# EAGLE board simple-pannel (EAGLE 5.07)
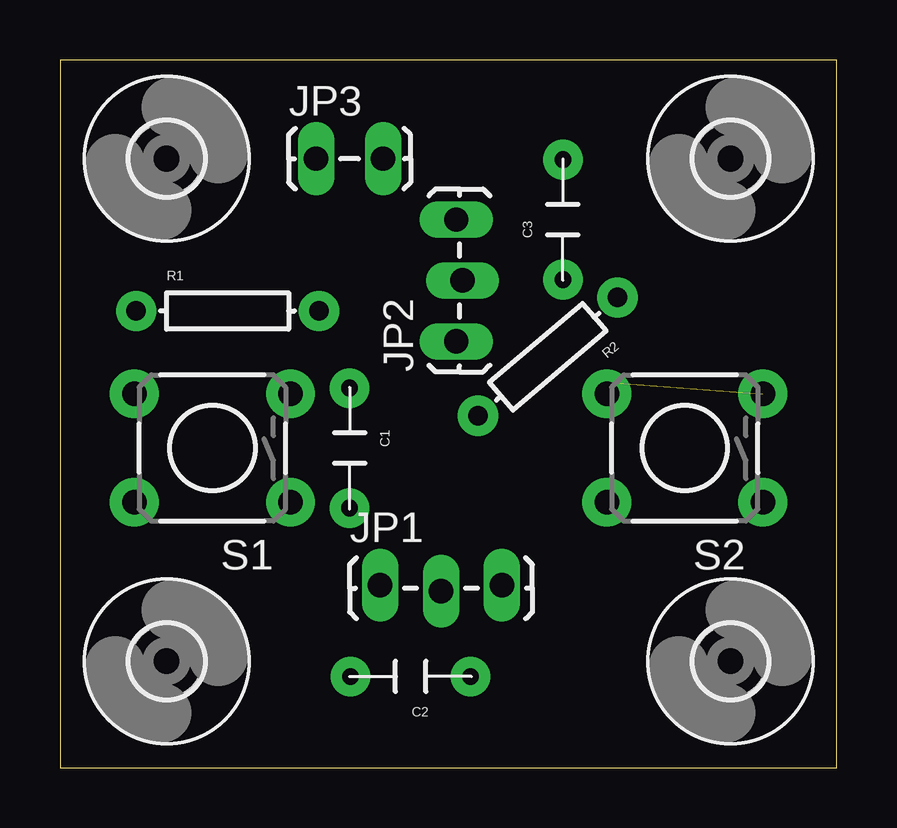
[diagram p0: board, top side]
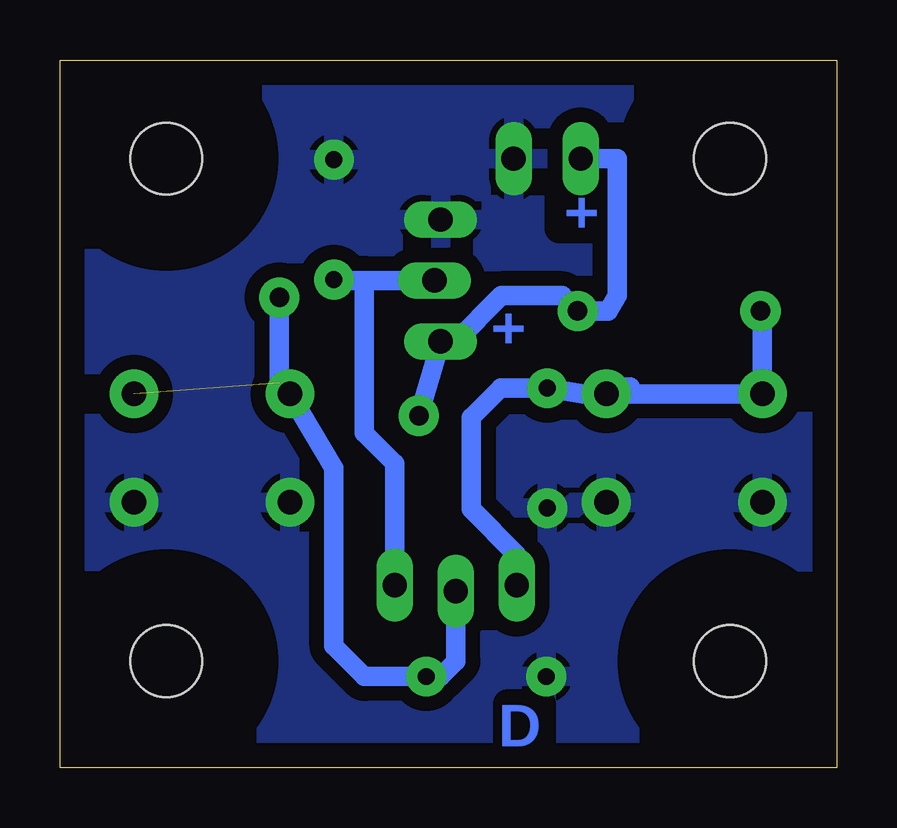
[diagram p1: board, bottom side, seen from below]

Size 32.37 x 29.52 mm. Coordinates in mm from the lower left corner, seen from the top.
Outline: 0,0 32.37,0 32.37,29.52 0,29.52 0,0
Copper layers (1*16): Top 0.035mm / dielectric 1.5mm / Bottom 0.035mm
Design rules "default": minimum track width 10mil, minimum drill 24mil, track to track 8mil, track to pad 8mil, pad to pad 8mil, via to via 8mil, smd to smd 8mil, copper to edge 40mil, drill to drill 8mil, minimum pad ring 10mil, minimum via ring 8mil, stop-mask expansion 4mil, vias tented up to drill 0mil, thermal gap 10mil

## Footprints (pad centres in the part's own frame; a part is rotated, then mirrored left to right if it is on the bottom)
CAP-PTH-5MM = drill 0.7 pad 1.651 round: 1 -2.5,0; 2 2.5,0
3,0 = hole 3: 0,0
1X03_LOCK_LONGPADS = drill 1.016 long: 1 0,0; 2 2.54,-0.254; 3 5.08,0
1X02_LOCK_LONGPADS = drill 1.016 long: 1 -0.127,0; 2 2.667,0
AXIAL-0.3 = drill 0.813 pad 1.676 round: P$1 -3.81,0; P$2 3.81,0
TACTILE-PTH = drill 1.016 pad 2.032 round: 1 -3.251,2.261; 2 3.251,2.261; 3 -3.251,-2.261; 4 3.251,-2.261

## Placement (x,y rotation side)
C1  [CAP-PTH-5MM]  12.06,13.34 270 top
C2  [CAP-PTH-5MM]  14.61,3.81 180 top
C3  [CAP-PTH-5MM]  20.95,22.86 90 top
H1  MOUNT-HOLE3.0  [3,0]  4.45,4.45 0 top
H2  MOUNT-HOLE3.0  [3,0]  27.94,4.45 0 top
H3  MOUNT-HOLE3.0  [3,0]  27.94,25.4 0 top
H4  MOUNT-HOLE3.0  [3,0]  4.45,25.4 0 top
JP1  [1X03_LOCK_LONGPADS]  13.34,7.62 0 top
JP2  [1X03_LOCK_LONGPADS]  16.51,17.78 90 top
JP3  [1X02_LOCK_LONGPADS]  10.79,25.4 0 top
R1  [AXIAL-0.3]  6.99,19.05 0 top
R2  [AXIAL-0.3]  20.32,17.14 220.3 top
S1  [TACTILE-PTH]  6.35,13.34 180 top
S2  [TACTILE-PTH]  26.04,13.34 180 top

## Library data of the parts
C1-C3 JP1-JP3 R1 R2 S1 S2 = digital-toy
H1-H4 = holes

## Nets
GND: C1.2 C2.2 C3.2 JP2.3 JP3.2 S1.1 S1.2 S2.1 S2.2
N$1: C3.1 JP1.3 JP2.2
N$3: C2.1 JP1.2 R2.P$1 S2.3 S2.4
N$4: C1.1 JP1.1 R1.P$1 S1.3 S1.4
VCC: JP2.1 JP3.1 R1.P$2 R2.P$2

## Tracks (layer width: path | path; a pad name or v marks a point on that pad's centre or on a via)
GND
  pour Bottom (isolate 0.61): -0.64,36.2 33.02,36.2 38.73,30.48 38.73,2.54 32.38,-3.81 0,-3.81 -4.45,0.64 -4.45,32.38
N$1
  Bottom 0.813: 19.68,20.32 JP2.2 | 19.68,20.32 20.91,20.32 C3.1 | JP1.3 18.41,12.7 19.68,13.97 19.68,20.32
N$3  (1 unrouted)
  Bottom 0.813: JP1.2 15.88,4.45 16.51,3.81 C2.1 19.68,3.81 20.95,5.08 20.95,12.5 S2.4 23.23,16.04 R2.P$1
N$4
  Bottom 0.813: R1.P$1 3.1,18.97 S1.4 S1.3 | S1.3 8.61,15.6 8.89,15.88 8.61,15.88 S1.3 | S1.3 10.56,15.6 C1.1 14.01,15.84 15.24,14.61 15.24,10.79 13.34,8.89 JP1.1
VCC
  Bottom 0.813: R2.P$2 JP2.1 15.88,17.78 13.97,19.68 11.43,19.68 R1.P$2 9.53,19.05 9.14,19.68 9.14,25.4 JP3.1

## Text on the board
Bottom: + | + | D